# Altium PCB STLink_PCB.PcbDoc
Units mil, origin at the board's own origin, x right, y up, seen from the top; angles counter-clockwise.
Board outline 6570 x 4555 mil, 2 copper layers (Top Layer, Bottom Layer); 71 components, 59 nets, 205 pads, 45 vias.
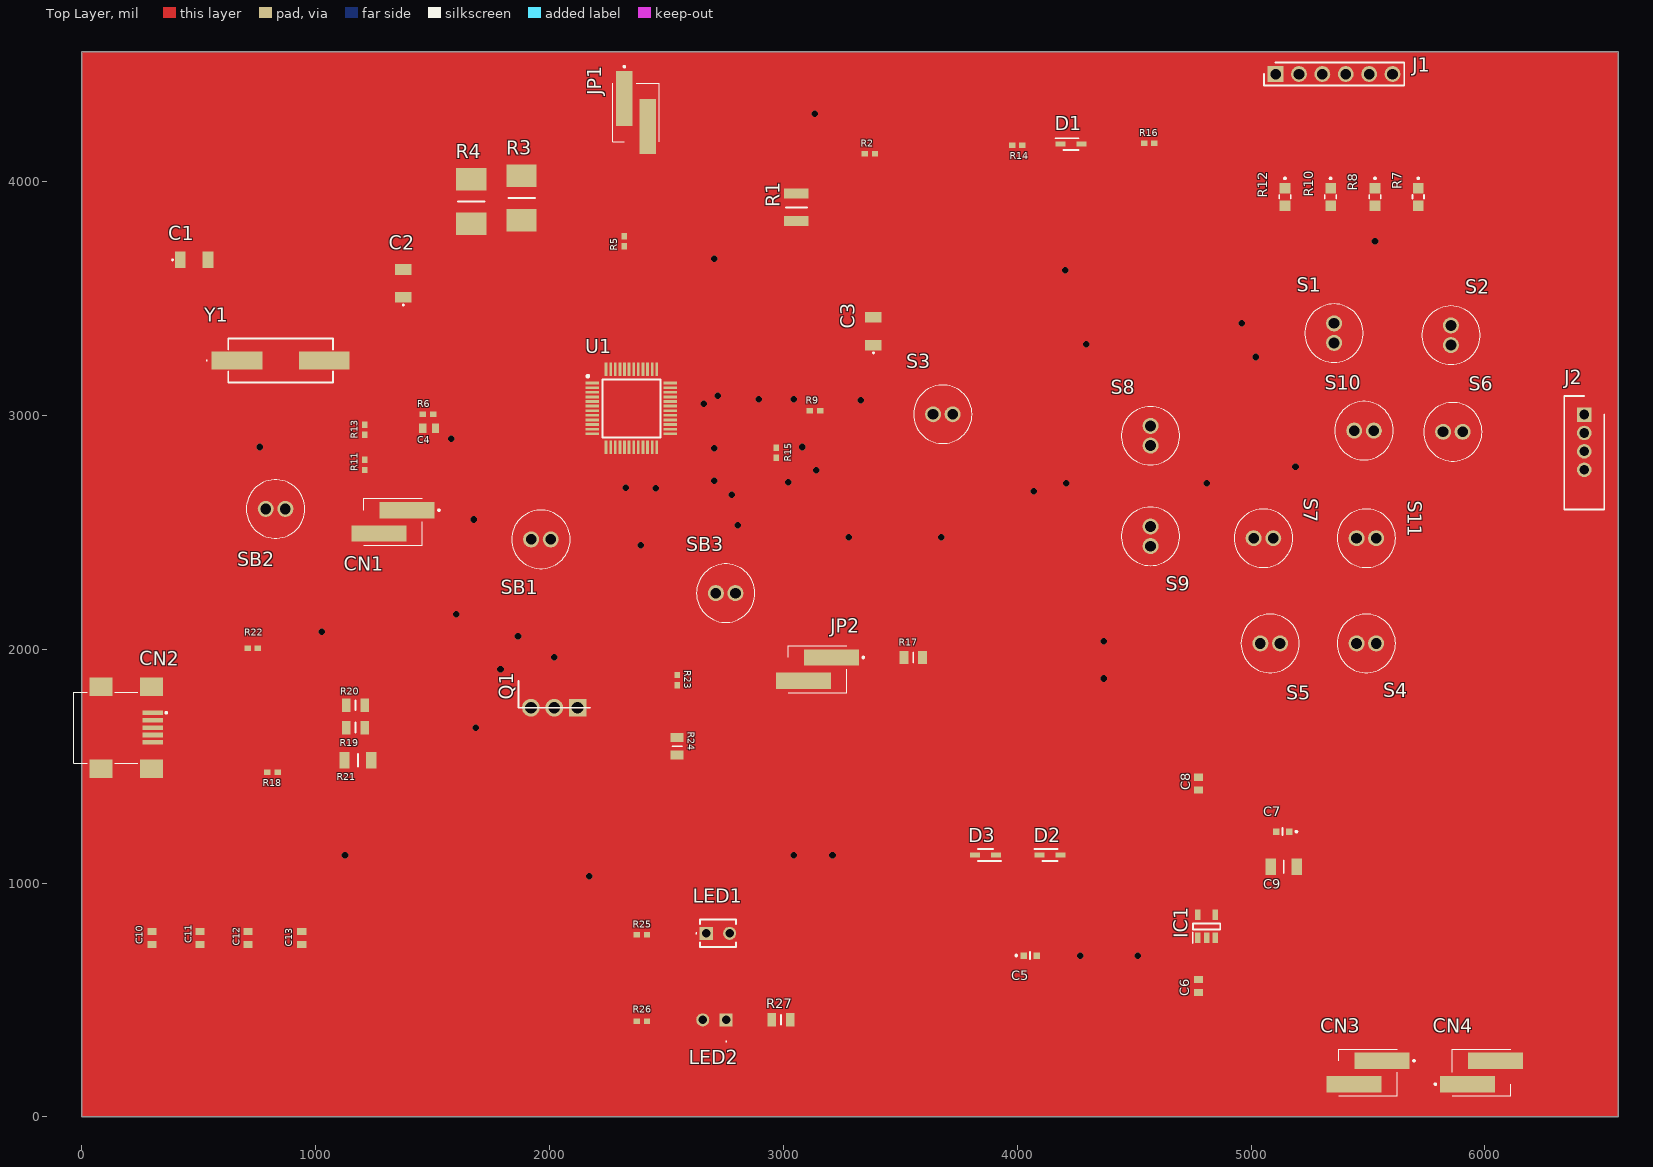
[diagram p0: Top Layer view]
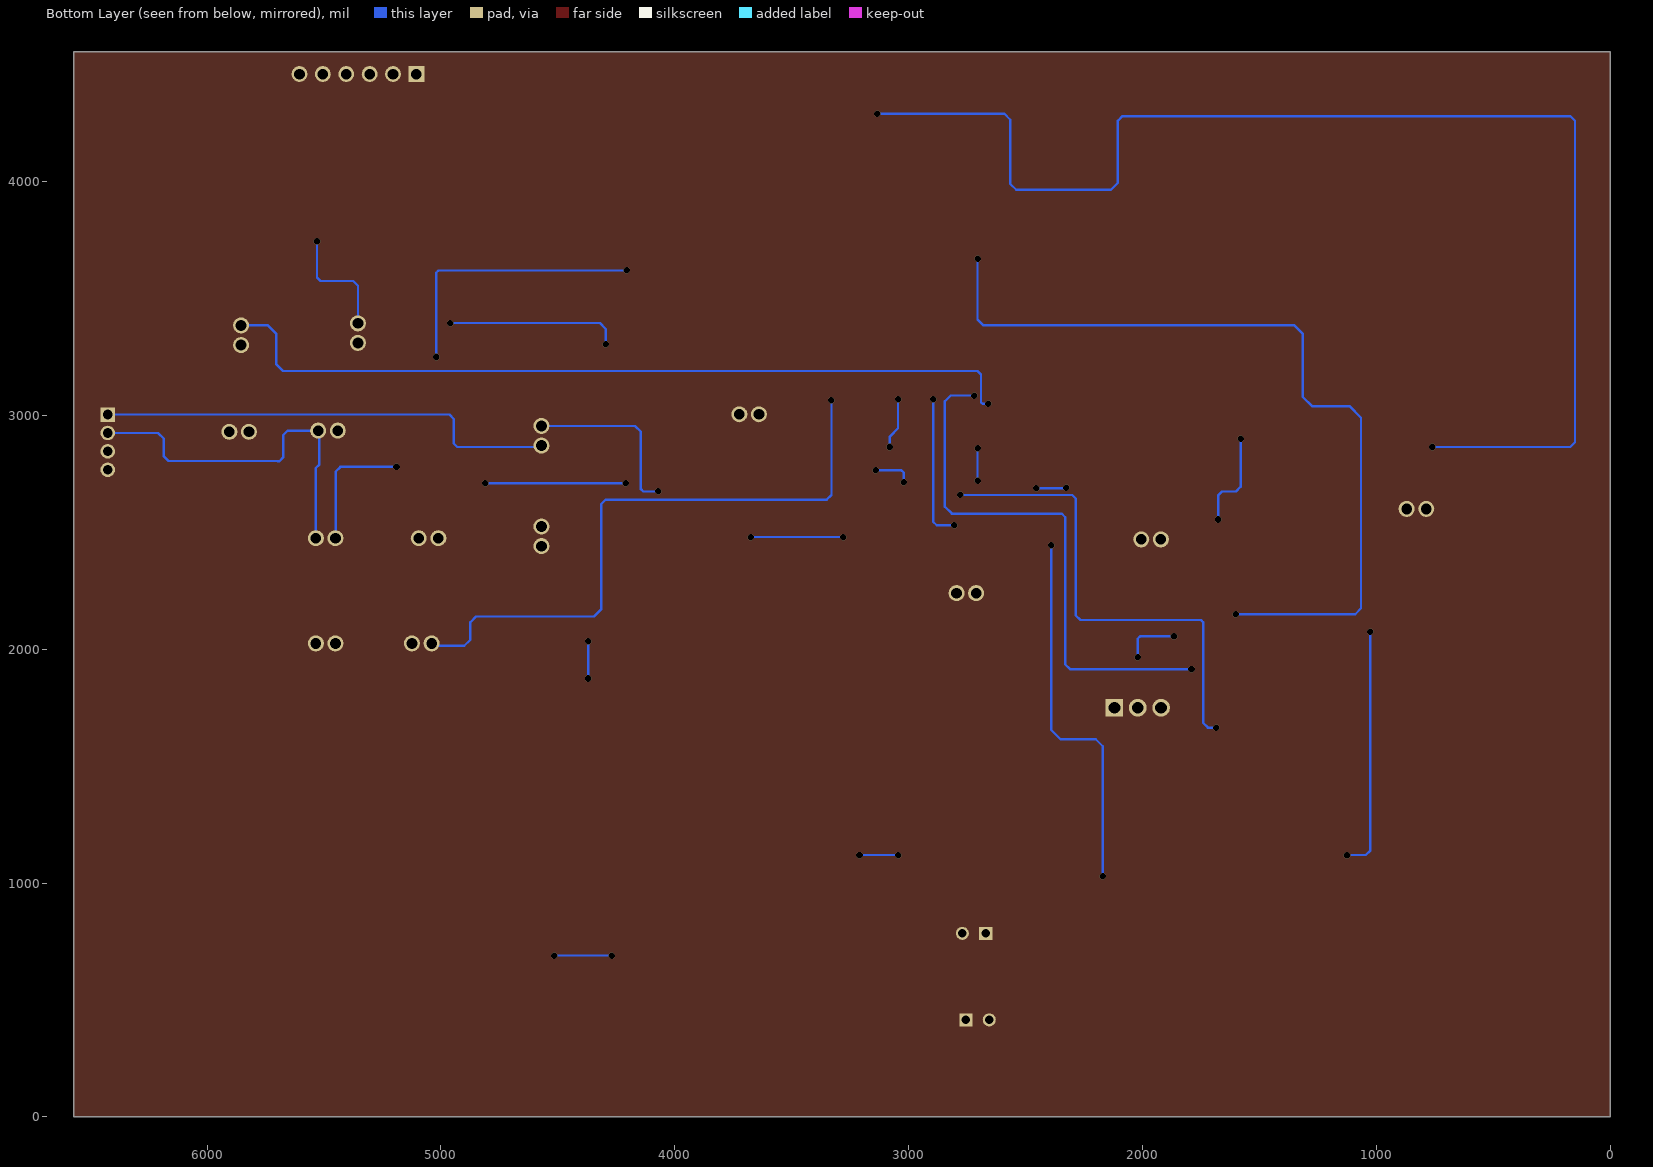
[diagram p1: Bottom Layer view, seen from below]
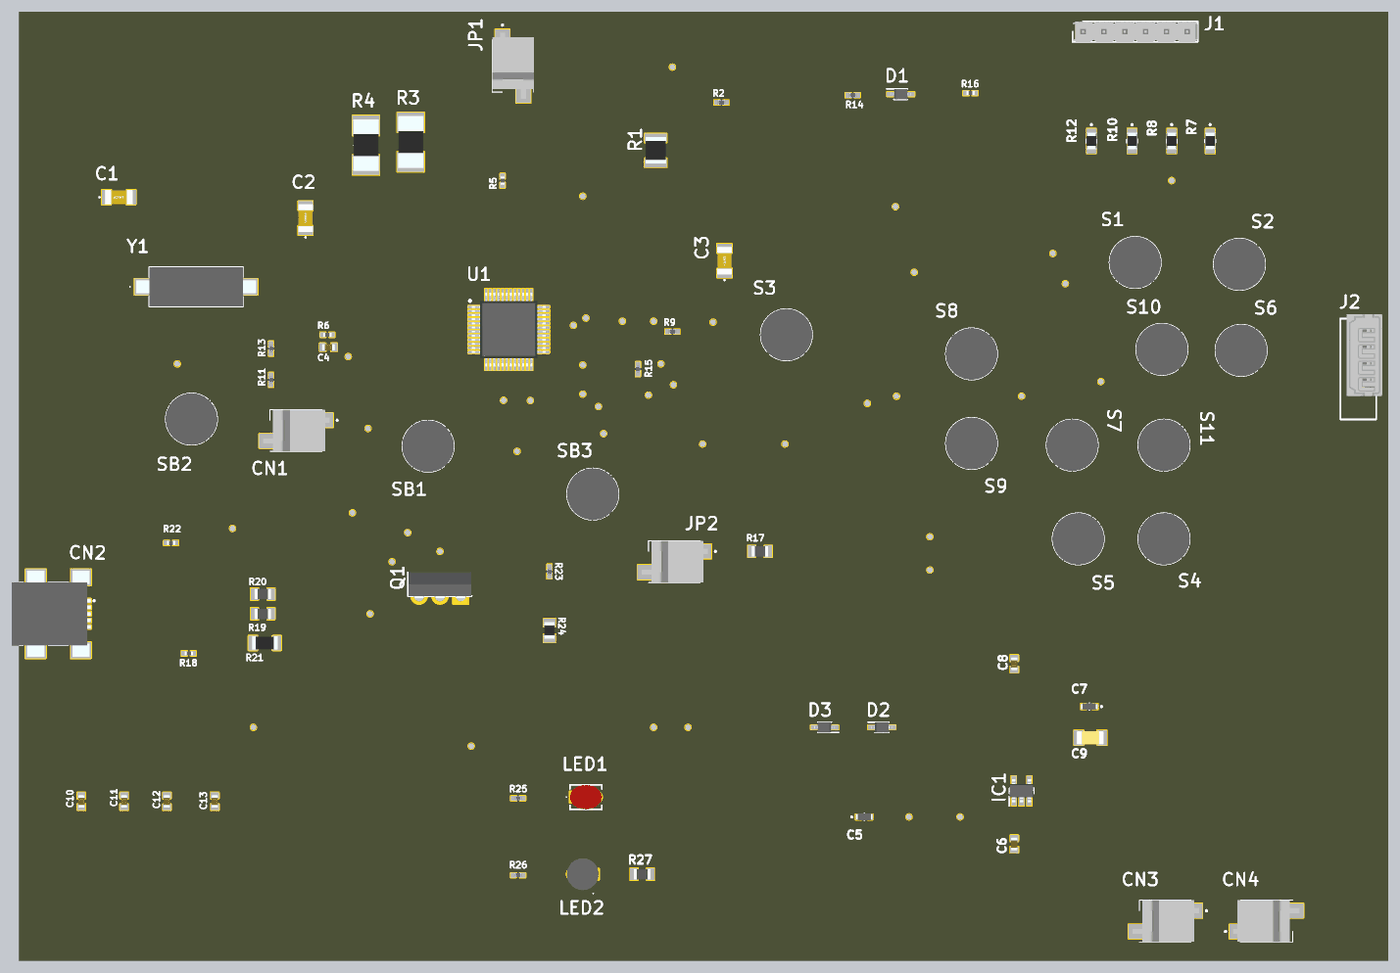
[diagram p2: 3D render of the assembled board from above, using the file's embedded part models]

## Layer stack, top to bottom
Top Solder: solder mask 0.4, Solder Resist, Dk 3.5
Top Layer: signal copper 1.4
Dielectric 1: dielectric 12.6, FR-4, Dk 4.8
Bottom Layer: signal copper 1.4
Bottom Solder: solder mask 0.4, Solder Resist, Dk 3.5

## Board outline
0,0 0,4555 6570,4555 6570,0

## Design rules (kind name [scope] priority, off if disabled: settings)
Clearance [All] p1: gap=10 ignorepadtopadclearanceinfootprint=FALSE
PolygonConnect [All] p1: connectstyle=Relief reliefconductorwidth=10 reliefentries=4 polygonreliefangle="90 Angle" airgapwidth=10
RoutingVias [All] p1: holewidth=28 width=50 viastyle="Through Hole" minholewidth=28 minwidth=50 maxholewidth=28 maxwidth=50
SolderMaskExpansion [All] p1: expansion=4 istentingtop=FALSE
Width [All] p1: maxlimit=10 minlimit=10 preferedwidth=10
30 further rules are at their usual default settings.

## Components (designator, comment, footprint, x,y, rotation, side; value= is the part's Value field where it differs from the comment)
C1 "20pF" C1206 480,3665 r0 top
C2 "20pF" C1206 1375,3565 r90 top
C3 "20pF" C1206 3385,3360 r90 top
C4 "100nF" CAPC1608X90N 1485,2945 r0 top
C5 "1uF" MAJx16 4055,690 r0 top
C6 "100nF" CAPC1608X90N 4775,560 r90 top
C7 "1uF" MAJx16 5135,1220 r180 top
C8 "100nF" CAPC1608X90N 4775,1425 r270 top
C9 "10nF X7R 0603" CAPC3316X145N 5140,1070 r180 top
C10 "100nF" CAPC1608X90N 300,765 r90 top
C11 "100nF" CAPC1608X90N 505,765 r90 top
C12 "100nF" CAPC1608X90N 710,765 r90 top
C13 "100nF" CAPC1608X90N 940,765 r90 top
CN1 "3-647166-2" 36471662 1330,2545 r90 top
CN2 "5075BMR-05-SM" 5075BMR05SM 165,1665 r270 top
CN3 "3-647166-2" 36471662 5500,190 r90 top
CN4 "3-647166-2" 36471662 5985,190 r270 top
D1 "BAT60JFILM" SOD2513X117N 4230,4160 r0 top
D2 "BAT60JFILM" SOD2513X117N 4140,1120 r0 top
D3 "BAT60JFILM" SOD2513X117N 3865,1120 r180 top
IC1 "LD3985M33R" SOT95P280X145-5N 4810,815 r90 top
J1 "22-28-4062" HDRV6W66P0X254_1X6_1524X249X838P 5105,4460 r0 top
J2 "53014-0410" SHDR4W60P0X200_1X4_1200X435X1000P 6425,3003.74 r90 top
JP1 "3-647166-2" 36471662 2370,4294.84 r180 top
JP2 "3-647166-2" 36471662 3145,1915 r90 top
LED1 "C4SMA-RGY-CS4V1BB1" C4SMARGYCS4V1BB1 2670,785 r0 top
LED2 "C4SMA-GGY-CU2W37A1" C4SMAGGYCU2W37A1 2755,415 r180 top
Q1 "BD139" TO254P290X760X1320-3P 2120,1750 r180 top
R1 "2K7" RESC3225X70N 3055,3890 r90 top
R2 "4K7" RESC1005X37N 3370,4120 r0 top
R3 "10K" RESC6331X80N 1880,3930 r270 top
R4 "10K" RESC6331X80N 1665,3915 r270 top
R5 "100K" RESC1005X40N 2320,3745 r90 top
R6 "100K" RESC1005X40N 1480,3005 r180 top
R7 "22" ERA6AEB1020V 5715,3935 r270 top
R8 "22" ERA6AEB1020V 5530,3935 r270 top
R9 "100" RESC1005X37N 3135,3020 r0 top
R10 "22" ERA6AEB1020V 5340,3935 r270 top
R11 "4K7" RESC1005X37N 1210,2788.35 r90 top
R12 "22" ERA6AEB1020V 5145,3935 r270 top
R13 "4K7" RESC1005X37N 1210,2938.35 r270 top
R14 "100" RESC1005X37N 4000,4155 r180 top
R15 "100" RESC1005X37N 2970,2840 r90 top
R16 "10K" RESC1005X40N 4565,4165 r180 top
R17 "0" RESC2013X84N 3555,1965 r0 top
R18 "100K" RESC1005X40N 815,1475 r180 top
R19 "0" RESC2013X84N 1170,1665 r0 top
R20 "0" RESC2013X84N 1170,1760 r0 top
R21 "1K5" RESC3116X65N 1180,1525 r0 top
R22 "10K" RESC1005X40N 730,2005 r180 top
R23 "100" RESC1005X37N 2545,1868.35 r90 top
R24 "36K" RESC2012X55N 2545,1585 r90 top
R25 "100" RESC1005X37N 2395,780 r0 top
R26 "100" RESC1005X37N 2395,410 r0 top
R27 "0" RESC2013X84N 2990,415 r0 top
S1 "8631CQD2" 8631CQD2 5355,3393.86 r270 top
S2 "8631CQD2" 8631CQD2 5855,3385 r270 top
S3 "8631CQD2" 8631CQD2 3640,3005 r0 top
S4 "8631CQD2" 8631CQD2 5535,2025 r180 top
S5 "8631CQD2" 8631CQD2 5123.86,2025 r180 top
S6 "8631CQD2" 8631CQD2 5821.14,2930 r0 top
S7 "8631CQD2" 8631CQD2 5095,2475 r180 top
S8 "8631CQD2" 8631CQD2 4570,2955 r270 top
S9 "8631CQD2" 8631CQD2 4570,2525 r270 top
S10 "8631CQD2" 8631CQD2 5441.14,2935 r0 top
S11 "8631CQD2" 8631CQD2 5535,2475 r180 top
SB1 "8631CQD2" 8631CQD2 2005,2470 r180 top
SB2 "8631CQD2" 8631CQD2 786.14,2600 r0 top
SB3 "8631CQD2" 8631CQD2 2795,2240 r180 top
U1 "STM32F103CBT6" QFP50P900X900X160-48N 2350,3030 r0 top
Y1 "ECS-80-12-5PX-GM-TR" ECS80125PXGMTR 850,3235 r0 top

## Footprints (in the part's own frame and the unit in brackets; to place one, negate y for a bottom-side part, rotate by r counter-clockwise, add the part's x,y. Pads: shape width x height; smd on the part's side, far side on the other; paste and mask are expansions set on the pad)
5075BMR05SM [mm]
  rect 0.5x2.25 smd: 1(-1.6,3.495) 2(-0.8,3.495) 3(0,3.495) 4(0.8,3.495) 5(1.6,3.495)
  rect 2x2.5 smd: 6(-4.45,3.37) 7(-4.45,-2.13) 8(4.45,-2.13) 9(4.45,3.37)
  silkscreen extent -3.85,-5.07 3.85,5.07, body extent -5.25,-5.07 5.25,4.57, height 4.1
8631CQD2 [mm]
  round 1.74 hole 1.16: 1(0,0) 2(2.13,0)
  silkscreen extent -2.11,-3.17 4.24,3.17, body extent -2.11,-3.18 4.24,3.18, height 14.03
36471662 [mm]
  rect 1.78x5.97 smd: 1(1.27,-1.52) 2(-1.27,1.52)
  silkscreen extent -2.54,-5.1 2.54,3.17, body extent -2.54,-4.08 2.54,4, height 10.55
C4SMAGGYCU2W37A1 [mm]
  rect 1.416x1.416 hole 0.91: 1(0,0)
  round 1.416 hole 0.91: 2(2.54,0)
  silkscreen extent -0.05,2.3 0.05,2.4, body extent -0.68,-1.95 3.22,1.95, height 8.9
C4SMARGYCS4V1BB1 [mm]
  rect 1.416x1.416 hole 0.91: 1(0,0)
  round 1.416 hole 0.91: 2(2.54,0)
  silkscreen extent -1.13,-1.5 3.22,1.5, body extent -0.68,-1.5 3.22,1.5, height 10.14
C1206 [mm]
  rect 1.15x1.8 smd: 1(-1.5,0) 2(1.5,0)
  silkscreen extent -2.4,-0.05 -2.3,0.05, body extent -1.7,-0.9 1.7,0.9, height 1.75
CAPC1608X90N [mm]
  rect 0.78x0.99 smd: 1(-0.7,0) 2(0.7,0)
  body extent -0.8,-0.41 0.8,0.41, height 0.9
CAPC3316X145N [mm]
  rect 1.17x1.82 smd: 1(-1.42,0) 2(1.42,0)
  silkscreen extent 0,-0.7 0,0.7, body extent -1.65,-0.8 1.65,0.8, height 1.68
ECS80125PXGMTR [mm]
  rect 5.5x2 smd: 1(-4.75,0) 2(4.75,0)
  silkscreen extent -8.1,-2.4 5.7,2.4, body extent -7.3,-2.4 7.3,2.4, height 4.4
ERA6AEB1020V [mm]
  rect 1.15x1.15 smd: 1(-0.95,0) 2(0.95,0)
  silkscreen extent -2.1,-0.63 0.2,0.63, body extent -1,-0.63 1,0.63, height 0.5
HDRV6W66P0X254_1X6_1524X249X838P [mm]
  rect 1.725x1.725 hole 1.15: 1(0,0)
  round 1.725 hole 1.15: 2(2.54,0) 3(5.08,0) 4(7.62,0) 5(10.16,0) 6(12.7,0)
  silkscreen extent -1.27,-1.24 13.97,1.24, body extent -1.27,-1.24 13.97,1.24, height 9.65
MAJx16 [mm]
  rect 0.7x0.7 smd: 1(-0.7,0) 2(0.7,0)
  silkscreen extent -1.6,-0.4 0,0.4, body extent -0.98,-0.4 0.98,0.4, height 0.9
QFP50P900X900X160-48N [mm]
  rect 1.475x0.3 smd: 1(-4.238,2.75) 2(-4.238,2.25) 3(-4.238,1.75) 4(-4.238,1.25) 5(-4.238,0.75) 6(-4.238,0.25) 7(-4.238,-0.25) 8(-4.238,-0.75) 9(-4.238,-1.25) 10(-4.238,-1.75) 11(-4.238,-2.25) 12(-4.238,-2.75) 25(4.238,-2.75) 26(4.238,-2.25) 27(4.238,-1.75) 28(4.238,-1.25) 29(4.238,-0.75) 30(4.238,-0.25) 31(4.238,0.25) 32(4.238,0.75) 33(4.238,1.25) 34(4.238,1.75) 35(4.238,2.25) 36(4.238,2.75)
  rect 0.3x1.475 smd: 13(-2.75,-4.238) 14(-2.25,-4.238) 15(-1.75,-4.238) 16(-1.25,-4.238) 17(-0.75,-4.238) 18(-0.25,-4.238) 19(0.25,-4.238) 20(0.75,-4.238) 21(1.25,-4.238) 22(1.75,-4.238) 23(2.25,-4.238) 24(2.75,-4.238) 37(2.75,4.238) 38(2.25,4.238) 39(1.75,4.238) 40(1.25,4.238) 41(0.75,4.238) 42(0.25,4.238) 43(-0.25,4.238) 44(-0.75,4.238) 45(-1.25,4.238) 46(-1.75,4.238) 47(-2.25,4.238) 48(-2.75,4.238)
  silkscreen extent -4.85,-3.15 3.15,3.62, body extent -4.5,-4.5 4.5,4.5, height 1.6
RESC1005X37N [mm]
  rect 0.7x0.6 smd: 1(-0.55,0) 2(0.55,0)
  body extent -0.5,-0.25 0.5,0.25, height 0.32
RESC1005X40N [mm]
  rect 0.7x0.6 smd: 1(-0.55,0) 2(0.55,0)
  body extent -0.5,-0.25 0.5,0.25, height 0.4
RESC2012X55N [mm]
  rect 1x1.45 smd: 1(-0.95,0) 2(0.95,0)
  silkscreen extent 0,-0.53 0,0.53, body extent -1,-0.63 1,0.63, height 0.55
RESC2013X84N [mm]
  rect 0.95x1.45 smd: 1(-1,0) 2(1,0)
  silkscreen extent 0,-0.54 0,0.54, body extent -1.01,-0.64 1.01,0.64, height 0.36
RESC3116X65N [mm]
  rect 1.1x1.8 smd: 1(-1.45,0) 2(1.45,0)
  silkscreen extent 0,-0.7 0,0.7, body extent -1.55,-0.8 1.55,0.8, height 0.65
RESC3225X70N [mm]
  rect 1.1x2.7 smd: 1(-1.5,0) 2(1.5,0)
  silkscreen extent 0,-1.15 0,1.15, body extent -1.6,-1.25 1.6,1.25, height 0.7
RESC6331X80N [mm]
  rect 2.45x3.3 smd: 1(-2.4,0) 2(2.4,0)
  silkscreen extent 0,-1.45 0,1.45, body extent -3.15,-1.55 3.15,1.55, height 0.8
SHDR4W60P0X200_1X4_1200X435X1000P [mm]
  rect 1.575x1.575 hole 1.05: 1(0,0)
  round 1.575 hole 1.05: 2(-2,0) 3(-4,0) 4(-6,0)
  silkscreen extent -10.3,-2.17 2,2.17, body extent -7.45,-2.96 2.55,1.39, height 5.85
SOD2513X117N [mm]
  rect 1.085x0.55 smd: 1(-1.14,0) 2(1.14,0)
  silkscreen extent -1.68,-0.64 0.83,0.64, body extent -1.25,-0.64 1.25,0.64, height 1.17
SOT95P280X145-5N [mm]
  rect 1.15x0.6 smd: 1(-1.25,0.95) 2(-1.25,0) 3(-1.25,-0.95) 4(1.25,-0.95) 5(1.25,0.95)
  silkscreen extent -1.83,-1.48 0.33,1.5, body extent -1.4,-1.48 1.4,1.48, height 1.45
TO254P290X760X1320-3P [mm]
  rect 1.92x1.92 hole 1.28: 1(0,0)
  round 1.92 hole 1.28: 2(2.54,0) 3(5.08,0)
  silkscreen extent -1.36,-2.9 6.44,0, body extent -1.26,-2.9 6.34,0.26, height 12.92

## Part data
C1 C2 C3: library part C1206C200KCGACTU, "Capacitor", Manufacturer_Name=KEMET, Datasheet Link=https://content.kemet.com/datasheets/KEM_C1009_C0G_HV_SMD.pdf, Manufacturer_Part_Number=C1206C200KCGACTU
C4 C6 C8 C10 C11 C12 C13: library part KAM15AR71H104KM, "Capacitor", Manufacturer_Name="Kyocera AVX", Mouser Part Number=581-KAM15AR71H104KM, Arrow Part Number=KAM15AR71H104KM, Arrow Price/Stock=https://www.arrow.com/en/products/kam15ar71h104km/avx?region=nac, Datasheet Link=https://datasheets.kyocera-avx.com/AutoMLCCKAM.pdf, Height=0.9mm, Manufacturer_Part_Number=KAM15AR71H104KM, Mouser Price/Stock=https://www.mouser.co.uk/ProductDetail/KYOCERA-AVX/KAM15AR71H104KM?qs=Jm2GQyTW%2FbgzS5FHJWrFzQ%3D%3D
C5 C7: library part MAJCT168BB7105KTEA01, "Capacitor", Manufacturer_Name="TAIYO YUDEN", Datasheet Link=https://ds.yuden.co.jp/TYCOMPAS/or/detail?pn=MAJCT168BB7105KTEA01, Height=0.8mm, Manufacturer_Part_Number=MAJCT168BB7105KTEA01
C9: library part KGM31GCG2J103JU, "Capacitor", Manufacturer_Name="Kyocera AVX", Mouser Part Number=581-KGM31GCG2J103JU, Datasheet Link=https://datasheets.kyocera-avx.com/HVKGM.pdf, Height=1.45mm, Manufacturer_Part_Number=KGM31GCG2J103JU, Mouser Price/Stock=https://www.mouser.co.uk/ProductDetail/KYOCERA-AVX/KGM31GCG2J103JU?qs=63Lh8XYXgjt6ivbLeGkCxg%3D%3D
CN1 CN3 CN4 JP1 JP2: "Connector", Manufacturer_Name="TE Connectivity", Mouser Part Number=571-3-647166-2, Arrow Part Number=3-647166-2, Arrow Price/Stock=https://www.arrow.com/en/products/3-647166-2/te-connectivity?region=nac, Datasheet Link=https://www.te.com/commerce/DocumentDelivery/DDEController?Action=showdoc&DocId=Customer+Drawing%7F647166%7FR1%7Fpdf%7FEnglish%7FENG_CD_647166_R1.pdf%7F3-647166-2, Height=10.66mm, Manufacturer_Part_Number=3-647166-2, Mouser Price/Stock=https://www.mouser.co.uk/ProductDetail/TE-Connectivity/3-647166-2?qs=xsTFCgGnzbJU1qz6Np9kzA%3D%3D
CN2: "Connector", Manufacturer_Name=NELTRON, Datasheet Link=http://www.ibselectronics.com/ibsstore/datasheet/5075BMR-05-SM-CR.pdf, Height=4mm, Manufacturer_Part_Number=5075BMR-05-SM
D1 D2 D3: "Schottky Diode", Manufacturer_Name=STMicroelectronics, Mouser Part Number=511-BAT60JFILM, Arrow Part Number=BAT60JFILM, Arrow Price/Stock=https://www.arrow.com/en/products/bat60jfilm/stmicroelectronics?region=nac, Datasheet Link=https://www.mouser.jp/datasheet/2/389/cd00001944-1795661.pdf, Height=1.17mm, Manufacturer_Part_Number=BAT60JFILM, Mouser Price/Stock=https://www.mouser.co.uk/ProductDetail/STMicroelectronics/BAT60JFILM?qs=GnFZssByvVVVnMaukcyLZg%3D%3D
IC1: "Integrated Circuit", Manufacturer_Name=STMicroelectronics, Mouser Part Number=511-LD3985M33R, Arrow Part Number=LD3985M33R, Arrow Price/Stock=https://www.arrow.com/en/products/ld3985m33r/stmicroelectronics?region=europe, Datasheet Link=http://www.st.com/st-web-ui/static/active/en/resource/technical/document/datasheet/CD00003395.pdf, Height=1.45mm, Manufacturer_Part_Number=LD3985M33R, Mouser Price/Stock=https://www.mouser.co.uk/ProductDetail/STMicroelectronics/LD3985M33R?qs=22WmWNTp1rrPOccVv4HZ7A%3D%3D
J1: "Connector", Manufacturer_Name=Molex, Mouser Part Number=538-22-28-4062, Datasheet Link=https://datasheet.datasheetarchive.com/originals/distributors/SFDatasheet-1/sf-00031037.pdf, Height=8.38mm, Manufacturer_Part_Number=22-28-4062, Mouser Price/Stock=https://www.mouser.com/Search/Refine.aspx?Keyword=538-22-28-4062
J2: "Connector", Manufacturer_Name=Molex, Mouser Part Number=538-53014-0410, Datasheet Link=https://www.molex.com/pdm_docs/sd/530140410_sd.pdf, Height=10mm, Manufacturer_Part_Number=53014-0410, Mouser Price/Stock=https://www.mouser.co.uk/ProductDetail/Molex/53014-0410?qs=TLs3Kb%252BkMqKk8s1WRHwRGw%3D%3D
LED1: "LED", Manufacturer_Name="CREE LED", Mouser Part Number=941-C4SMARGYCS4V1BB1, Arrow Part Number=C4SMA-RGY-CS4V1BB1, Arrow Price/Stock=https://www.arrow.com/en/products/c4sma-rgy-cs4v1bb1/cree-led?region=nac, Datasheet Link=https://cree-led.com/media/documents/C4SMA-1442.pdf, Height=8.8mm, Manufacturer_Part_Number=C4SMA-RGY-CS4V1BB1, Mouser Price/Stock=https://www.mouser.co.uk/ProductDetail/Cree-LED/C4SMA-RGY-CS4V1BB1?qs=7D1LtPJG0i08%2Fw1qRIcnyw%3D%3D
LED2: "LED", Manufacturer_Name="CREE LED", Mouser Part Number=941-C4SMAGGYCU2W37A1, Datasheet Link=https://cree-led.com/media/documents/C4SMA-1442.pdf, Height=8.8mm, Manufacturer_Part_Number=C4SMA-GGY-CU2W37A1, Mouser Price/Stock=https://www.mouser.co.uk/ProductDetail/Cree-LED/C4SMA-GGY-CU2W37A1?qs=7D1LtPJG0i1gnYL5Rh9Mjg%3D%3D
Q1: "Transistor BJT NPN", Manufacturer_Name=STMicroelectronics, Mouser Part Number=511-BD139, Arrow Part Number=BD139, Arrow Price/Stock=https://www.arrow.com/en/products/bd139/stmicroelectronics?region=europe, Datasheet Link=http://www.st.com/web/en/resource/technical/document/datasheet/CD00001225.pdf, Height=2.9mm, Manufacturer_Part_Number=BD139, Mouser Price/Stock=https://www.mouser.co.uk/ProductDetail/STMicroelectronics/BD139?qs=ljbEvF4DwOPW%2FLxHSWYMMA%3D%3D
R1: library part CRCW12102K70FKEAHP, "Resistor", Manufacturer_Name=Vishay, Mouser Part Number=71-CRCW12102K70FKEAH, Datasheet Link=http://componentsearchengine.com/Datasheets/1/CRCW12102K70FKEAHP.pdf, Height=0.7mm, Manufacturer_Part_Number=CRCW12102K70FKEAHP, Mouser Price/Stock=https://www.mouser.co.uk/ProductDetail/Vishay-Dale/CRCW12102K70FKEAHP?qs=OAzHGkhREL0m0%252BU1n6AaAg%3D%3D
R2 R11 R13: library part MCS04020D4701BE000, "Resistor", Manufacturer_Name=Vishay, Mouser Part Number=594-MCS04020D4701BE0, Datasheet Link=http://www.vishay.com/docs/28705/mcx0x0xpro.pdf, Height=0.37mm, Manufacturer_Part_Number=MCS04020D4701BE000, Mouser Price/Stock=https://www.mouser.co.uk/ProductDetail/Vishay-Beyschlag/MCS04020D4701BE000?qs=ft9OtscSA3%252BR0DpF5QqL2Q%3D%3D
R3 R4: library part CRM2512QJW-103ELF, "Resistor", Manufacturer_Name=Bourns, Mouser Part Number=652-CRM2512QJW-103E, Arrow Part Number=CRM2512QJW-103ELF, Arrow Price/Stock=https://www.arrow.com/en/products/crm2512qjw-103elf/bourns?region=nac, Datasheet Link=http://www.bourns.com/data/global/pdfs/CRM0805_1206_2010.pdf, Height=0.8mm, Manufacturer_Part_Number=CRM2512QJW-103ELF, Mouser Price/Stock=https://www.mouser.co.uk/ProductDetail/Bourns/CRM2512QJW-103ELF?qs=8Wlm6%252BaMh8Rzg3bRHdWGsA%3D%3D
R5 R6 R16 R18 R22: library part SFR01MZPF1003, "Resistor", Manufacturer_Name="ROHM Semiconductor", Mouser Part Number=755-SFR01MZPF1003, Datasheet Link=https://fscdn.rohm.com/en/products/databook/datasheet/passive/resistor/chip_resistor/sfr-e.pdf, Height=0.4mm, Manufacturer_Part_Number=SFR01MZPF1003, Mouser Price/Stock=https://www.mouser.co.uk/ProductDetail/ROHM-Semiconductor/SFR01MZPF1003?qs=Mv7BduZupUj2RFL5gMaKTg%3D%3D
R7 R8 R10 R12: library part ERA-6AHD220V, "Resistor", Manufacturer_Name=Panasonic, Mouser Part Number=667-ERA-6AHD220V, Datasheet Link=https://industrial.panasonic.com/cdbs/www-data/pdf/RDM0000/AOA0000C307.pdf, Height=0.6mm, Manufacturer_Part_Number=ERA-6AHD220V, Mouser Price/Stock=https://www.mouser.co.uk/ProductDetail/Panasonic/ERA-6AHD220V/?qs=MNPzkKEzRtQTWqg2JSKn2A%3D%3D
R9 R14 R15 R23 R25 R26: library part MCS04020C1000FE000, "Resistor", Manufacturer_Name=Vishay, Mouser Part Number=594-MCS04020C1000FE0, Arrow Part Number=MCS04020C1000FE000, Arrow Price/Stock=https://www.arrow.com/en/products/mcs04020c1000fe000/vishay, Datasheet Link=http://www.vishay.com/docs/28705/mcx0x0xpro.pdf, Height=0.37mm, Manufacturer_Part_Number=MCS04020C1000FE000, Mouser Price/Stock=https://www.mouser.co.uk/ProductDetail/Vishay-Beyschlag/MCS04020C1000FE000?qs=7ZE6F4QMOBYkwvQlfbkT8w%3D%3D
R17 R19 R20 R27: library part WSL080500000ZEA9, "Resistor", Manufacturer_Name=Vishay, Mouser Part Number=71-WSL080500000ZEA9, Arrow Part Number=WSL080500000ZEA9, Arrow Price/Stock=https://www.arrow.com/en/products/wsl080500000zea9/vishay?region=nac, Datasheet Link=https://ad.componentsearchengine.com/Datasheets/2/WSL080500000ZEA9.pdf, Height=0.838mm, Manufacturer_Part_Number=WSL080500000ZEA9, Mouser Price/Stock=https://www.mouser.co.uk/ProductDetail/Vishay-Dale/WSL080500000ZEA9?qs=f1l5vAGoKgsImKS87N8TmQ%3D%3D
R21: library part CRCW12061K50FKEAHP, "Resistor", Manufacturer_Name=Vishay, Mouser Part Number=71-CRCW12061K50FKEAH, Arrow Part Number=CRCW12061K50FKEAHP, Arrow Price/Stock=https://www.arrow.com/en/products/crcw12061k50fkeahp/vishay?region=nac, Datasheet Link=http://componentsearchengine.com/Datasheets/1/CRCW12061K50FKEAHP.pdf, Height=0.65mm, Manufacturer_Part_Number=CRCW12061K50FKEAHP, Mouser Price/Stock=https://www.mouser.co.uk/ProductDetail/Vishay-Dale/CRCW12061K50FKEAHP?qs=k2%2FDWSARqgEwHXAQbL4aEg%3D%3D
R24: library part TNPW080536K0BEEA, "Resistor", Manufacturer_Name=Vishay, Datasheet Link=https://www.vishay.com/docs/31006/tnpw.pdf, Height=0.55mm, Manufacturer_Part_Number=TNPW080536K0BEEA
S1 S2 S3 S4 S5 S6 S7 S8 S9 S10 S11 SB1 SB2 SB3: "Switch (2-Pin Push)", Manufacturer_Name="C & K COMPONENTS", Mouser Part Number=611-8631-261, Datasheet Link=https://www.ckswitches.com/media/1396/8600.pdf, Height=13.93mm, Manufacturer_Part_Number=8631CQD2, Mouser Price/Stock=https://www.mouser.co.uk/ProductDetail/CK/8631CQD2?qs=ktcBc77oICXe9iPhfEwnkA%3D%3D
U1: "Integrated Circuit", Manufacturer_Name=STMicroelectronics, Mouser Part Number=511-STM32F103CBT6, Arrow Part Number=STM32F103CBT6, Arrow Price/Stock=https://www.arrow.com/en/products/stm32f103cbt6/stmicroelectronics?region=europe, Datasheet Link=http://www.st.com/st-web-ui/static/active/en/resource/technical/document/datasheet/CD00161566.pdf, Height=1.6mm, Manufacturer_Part_Number=STM32F103CBT6, Mouser Price/Stock=https://www.mouser.co.uk/ProductDetail/STMicroelectronics/STM32F103CBT6?qs=WxFF5lh7QM3goh6GV5Ogig%3D%3D
Y1: "Crystal or Oscillator", Manufacturer_Name=ECS, Mouser Part Number=520-80-12-5PX-GM-TR, Datasheet Link=https://ecsxtal.com/store/pdf/csm-7x.pdf, Height=4.3mm, Manufacturer_Part_Number=ECS-80-12-5PX-GM-TR, Mouser Price/Stock=https://www.mouser.co.uk/ProductDetail/ECS/ECS-80-12-5PX-GM-TR?qs=amGC7iS6iy%252BwzUdIY7WpOA%3D%3D

## Via types
v1: diameter 28, hole 28, Top Layer to Bottom Layer, 45 vias

## Nets (pads, with @x,y where several pads share a name; then routed paths per layer and width w, separated by ;. In a path a pad name is that pad's centre, name@x,y a point inside that pad or via, vN(x,y) a via of type N, cw(c..) or ccw(c..) an arc to the next point about the centre after c; other vN are vias at no path point)
+3V3: R11.1
+3V3_ST_LINK: C7.2 C8.2 C10.2 C11.2 C12.2 C13.2 IC1.5 JP1.1 Q1.2 R6.2 R17.2 R27.2 S9.2 U1.1 U1.9 U1.24 U1.36 U1.48 | length 17419.7
  Top Layer w9.96: U1.1@2183.15,3140 2240,3140 ; U1.9@2184.37,2982.01 2312.01,2982.01 2325,2995 2325,3090 ; U1.48@2240,3210 2240,3140 ; U1.24 2458.27,3090 ; 2460,3090 2458.27,3090 ; U1.36 2468.27,3138.27 2458.27,3128.27 2458.27,3090 ; 2240,3140 2240,3105 2255,3090 2325,3090 ; 2325,3090 2458.27,3090
  Top Layer w10: C10.2 300,915 310,925 505,925 ; C11.2 505,920 510,925 710,925 ; C12.2 710,925 ; C13.2 940,925 ; R6.2 1360,3005 ; v1(1865,2055) 1550,2055 1530,2075 1530,2260 1510,2280 560,2280 525,2315 525,2975 555,3005 1360,3005 ; v1(2020,1965) Q1.2 2020,1195 ; U1.9@2184.37,2982.01 U1.9 2181.93,2979.57 1674.57,2979.57 1665,2970 1665,2875 1650,2860 1375,2860 1360,2875 1360,3005 ; U1.48 2241.73,3961.73 2265,3985 2295,3985 2320,4010 JP1.1 ; R27.2 3125,415 ; R17.2 4570,1965 ; S9.2 4570,1965 ; IC1.5 4775,866.61 4775,1080 ; C8.2 4775,1220 ; C7.2 4775,1220 ; 710,925 940,925 ; 940,925 940,1170 965,1195 2020,1195 ; 2020,1195 2815,1195 2815.86,1194.14 2824.14,1194.14 2825,1195 3105,1195 3125,1175 3125,415 ; 3125,415 4400,415 4420,435 4420,1060 4440,1080 4775,1080 ; 4570,1965 4570,1235 4585,1220 4775,1220 ; 4775,1080 4775,1220
  Bottom Layer w10: v1(1865,2055) 2010,2055 2020,2045 v1(2020,1965)
"AIN 1": R11.2 R13.2 R14.2 U1.10 | length 8248.6
  Top Layer w10: v1(760,2865) 1210,2865 ; R11.2 1210,2863.35 ; R13.2 1210,2863.35 ; U1.10@2183.15,2959.57 1715,2959.57 1700,2944.57 1700,2815 1680,2795 1335,2795 1315,2815 1315,2850 1301.65,2863.35 1210,2863.35 ; v1(3135,4290) 3560,4290 3575,4275 3575,4175 3595,4155 R14.2
  Bottom Layer w10: v1(760,2865) 170,2865 150,2885 150,4260 170,4280 2085,4280 2105,4260 2105,3995 2135,3965 2540,3965 2565,3990 2565,4265 2590,4290 v1(3135,4290)
E5V: D2.2 R1.1 | length 4164.2
  Top Layer w10: R1.1 3055,3715 3090,3680 4345,3680 4370,3655 v1(4370,2035) ; D2.2 4350,1120 4370,1140 v1(4370,1875)
  Bottom Layer w10: v1(4370,1875) v1(4370,2035)
GND: C1.2 C2.2 C3.2 C4.1 C5.1 C6.1 C7.1 C8.1 C9.1 C10.1 C11.1 C12.1 C13.1 CN2.5 CN2.6 CN2.7 CN2.8 CN2.9 CN3.1 CN3.2 CN4.1 CN4.2 IC1.2 J1.3 JP2.2 LED1.2 R2.2 R3.1 R4.1 R5.2 R13.1 R16.1 R18.1 R24.1 S7.2 SB1.1 U1.8 U1.20 U1.23 U1.35 U1.47 | length 1494.5
  Top Layer w10: C10.1 300,535 315,520 505,520 ; C11.1 505,520 ; C12.1 710,520 ; C13.1 940,535 925,520 710,520 ; R5.2 R5.2@2321.65,3765 ; 505,520 710,520
"LED STLINK": R25.1 R26.1 U1.30 | length 4188.2
  Top Layer w10: v1(2170,1030) 2170,780 ; R26.1 2185,410 2170,425 2170,780 ; R25.1 2170,780 ; v1(2390,2445) 2390,2515 2405,2530 v1(2805,2530) ; U1.30@2516.85,3019.53 2642.81,3019.53 2643.76,3020.47 2685,3020.47 2704.53,3040 2805,3040 2815,3050 2815,3099.14 2820.86,3105 2889.14,3105 2895,3099.14 v1(2895,3070)
  Bottom Layer w10: v1(2170,1030) 2170,1585 2200,1615 2350,1615 2390,1655 v1(2390,2445) ; v1(2805,2530) 2880,2530 2895,2545 v1@2895,3060
MCO: S3.2
NetC3_1: C3.1 R9.2 S3.1 | length 787.6
  Top Layer w10: R9.2 3210,3020 3225,3005 3385,3005 ; C3.1 3385,3005 ; S3.1@3635,3000 S3.1 ; S3.1@3635,3005 3385,3005
NetC5_2: C5.2 C6.2 D2.1 D3.1 IC1.1 IC1.3 | length 1761.6
  Top Layer w10: D3.1 4030,1120 ; C5.2 4176.28,690 ; D2.1 4030,1120 ; v1(4270,690) 4176.28,690 ; v1(4515,690) 4772.6,690 ; IC1.1 4772.6,690 ; C6.2 4772.6,589.96 4772.6,690 ; IC1.3 4847.4,702.4 4835,690 4772.6,690 ; 4030,1120 4030,905 4040,895 4165,895 4176.28,883.72 4176.28,690
  Bottom Layer w10: v1(4270,690) v1(4515,690)
NetC9_2: C9.2 IC1.4 | length 432.2
  Top Layer w10: IC1.4 4847.4,1052.4 4865,1070 C9.2
NetCN2_2: CN2.2 R20.1 | length 854.3
  Top Layer w10: CN2.2 966.5,1696.5 1030,1760 R20.1
NetCN2_3: CN2.3 R19.1 R21.1 | length 1112.2
  Top Layer w10: CN2.3 970,1665 ; R21.1 985,1525 970,1540 970,1665 ; R19.1 970,1665
NetCN2_4: CN2.4 R18.2 | length 645.5
  Top Layer w10: CN2.4 581.5,1633.5 590,1625 590,1485 600,1475 R18.2 R18.2@788.35,1470
NetD1_1: D1.1 R14.1 | length 165.5
  Top Layer w10: R14.1 4024.15,4157.5 4182.62,4157.5 D1.1
NetD1_2: D1.2 J1.1 R16.2 | length 1205.5
  Top Layer w10: D1.2 4277.38,4162.5 4450,4162.5 ; R16.2 4540.85,4162.5 4450,4162.5 ; J1.1 5105,4365 5090,4350 4465,4350 4450,4335 4450,4162.5
NetJ1_2: J1.2 R12.1 | length 512.5
  Top Layer w10: R12.1 5145,4285 5200,4340 5200,4455 J1.2
NetJ1_4: J1.4 R10.1 | length 514.5
  Top Layer w10: R10.1 5340,4280 5405,4345 J1.4
NetJ1_5: J1.5 R8.1 | length 498
  Top Layer w10: J1.5 5505,4350 5530,4325 R8.1
NetJ1_6: J1.6 R7.1 | length 571.2
  Top Layer w10: J1.6 5605,4380 5625,4360 5690,4360 5715,4335 R7.1
NetJ2_1: J2.1 S8.2 S9.1 | length 2322.7
  Top Layer w10: S9.1 S8.2
  Bottom Layer w10: S8.2 4576.14,2865 4930,2865 4945,2880 4945,2985 4963.74,3003.74 J2.1
NetJ2_2: J2.2 S10.2 S11.1 | length 1572.1
  Bottom Layer w10: S11.1 5535,2775 5520,2790 5520,2930 S10.2 5655,2935 5675,2915 5675,2820 5690.86,2804.14 5699.14,2804.14 5700,2805 6165,2805 6185,2825 6185,2900 6210,2925 J2.2
NetJ2_3: J2.3 S6.2 S7.1 | length 2219.7
  Top Layer w10: S7.1 5255,2475 5265,2465 5265,2300 5290,2275 5880,2275 5905,2300 S6.2 6130,2930 6145,2915 6145,2855 6153.74,2846.26 J2.3
NetJ2_4: J2.4 S4.2 S5.1 | length 2482.8
  Top Layer w10: S5.1 S4.2 5450,2023.86 5450,1815 5480,1785 6125,1785 6145,1805 6145,2745 6167.52,2767.52 J2.4
NetJP1_2: JP1.2 R1.2 R2.1 U1.39 | length 2795.3
  Top Layer w10: U1.39 2418.9,4233.9 JP1.2 2420,4500 2435,4515 3040,4515 3055,4500 3055,4120 ; R1.2 3055,4120 ; R2.1 3055,4120
NetJP2_1: JP2.1 R17.1 U1.21 | length 2175.8
  Top Layer w10: U1.21 2399.21,2640.79 2420,2620 3370,2620 3390,2600 3390,1965 ; JP2.1 3390,1965 ; R17.1 3390,1965
NetLED1_1: LED1.1 R25.2 | length 255.4
  Top Layer w10: R25.2 2665,780 LED1.1
NetLED2_1: LED2.1 R27.1 | length 195.6
  Top Layer w10: LED2.1 R27.1
NetLED2_2: LED2.2 R26.2 | length 240.4
  Top Layer w10: R26.2 2419.15,412.5 2652.5,412.5 LED2.2
NetQ1_1: Q1.1 R22.1 R23.1 R24.2 | length 2252.1
  Top Layer w10: R22.1 2085,2005 2115,1975 2115,1755 Q1.1 2545,1750 ; R24.2 2545,1750 ; R23.1 2545,1750
NetQ1_3: Q1.3 R21.2 | length 899.8
  Top Layer w10: R21.2 1905,1525 1920.86,1540.86 1920.86,1629.85 1920,1630.71 Q1.3
NetR3_2: R3.2 U1.2 | length 1000.5
  Top Layer w10: R3.2 1880,3155 1915,3120 2178.28,3120 2179.7,3118.58 U1.2 U1.2@2181.93,3119.8
NetR4_2: R4.2 U1.3 | length 1219.2
  Top Layer w10: R4.2 1665,3135 1702.5,3097.5 U1.3@2183.15,3097.5
NetR5_1: R5.1 U1.44 | length 526.7
  Top Layer w10: R5.1 2320.47,3722.87 U1.44
NetR9_1: R9.1 U1.29 | length 605
  Top Layer w10: U1.29@2516.85,2999.53 2651.1,2999.53 2652.04,3000.47 2700.47,3000.47 2720,3020 R9.1
NetS1_2: S1.2
NetS2_2: S2.2
NetS4_1: S4.1
NetS10_1: S10.1
NetSB2_1: SB2.1
NetSB3_1: SB3.1
NetU1_28: U1.28
"OSC IN": C2.1 U1.5 Y1.2 | length 1568.7
  Top Layer w10: Y1.2 1375,3235 ; C2.1 1375,3235 ; U1.5@2183.15,3060 1640,3060 1625,3075 1625,3210 1600,3235 1375,3235
"OSC OUT": C1.1 U1.6 Y1.1 | length 2897.4
  Top Layer w10: C1.1 270,3665 250,3645 250,3245 260,3235 445,3235 ; Y1.1 445,3235 ; U1.6 1560.16,3039.84 1525,3075 465,3075 445,3095 445,3235
STLINK_RX: CN1.2 SB3.2 U1.13 | length 2390.1
  Top Layer w10: CN1.2 1585,2495 1605,2475 1605,2225 1630,2200 2240,2200 ; U1.13 2241.73,2201.73 2240,2200 ; SB3.2 2525,2240 2485,2200 2240,2200
STLINK_TX: CN1.1 SB2.2 U1.12 | length 1630.4
  Top Layer w10: SB2.2 1384.84,2600 CN1.1 1394.84,2590 1750,2590 1765,2605 1765,2905 1781.73,2921.73 U1.12
"STM JTCK": S11.2 U1.37 | length 4524.2
  Top Layer w10: U1.37 2458.27,3603.27 2475,3620 v1(4205,3620) ; v1(5020,3250) 5020,2795 5035,2780 v1(5190,2780)
  Bottom Layer w10: v1(4205,3620) 5010,3620 5020,3610 v1(5020,3250) ; v1(5190,2780) 5430,2780 5450,2760 5450,2476.14 S11.2
"STM JTMS": S5.2 U1.34 | length 3591.4
  Top Layer w10: U1.34@2516.85,3100 2578.99,3100 2627.99,3149 3296,3149 3330,3115 v1(3330,3065)
  Bottom Layer w10: v1(3330,3065) 3330,2660 3350,2640 4295,2640 4315,2620 4315,2170 4345,2140 4850,2140 4875,2115 4875,2040 4900,2015 5030,2015 S5.2
"STM RST": C4.2 R6.1 SB1.2 U1.7 | length 1593.1
  Top Layer w10: R6.1 1580,3005 v1(1580,2900) ; C4.2 1574.14,2945 ; 1580.08,3004.92 1580.16,3005 1630.16,3005 1645,3019.84 U1.7@2183.15,3019.84 ; v1(1675,2555) 1675,2490 1695,2470 SB1.2
  Bottom Layer w10: v1(1580,2900) 1580,2695 1600,2675 1660,2675 1675,2660 v1(1675,2555)
"T JTCK": R12.2 S8.1 U1.15 U1.26 | length 4792.1
  Top Layer w10: U1.15 2281.1,2700.86 2291,2690.96 2324.04,2690.96 v1(2325,2690) ; v1(2453.44,2689) 2454.44,2690 2714.3,2690 3010,2690 3020,2700 v1(3020,2715) ; U1.26@2516.85,2941.1 2724.14,2941.1 2730,2935.24 2730,2910 2708.44,2888.44 2708.44,2863.44 v1(2705,2860) ; v1(2705,2720) 2708.44,2716.56 2708.44,2695.86 ; v1(3140,2765) 3240,2765 3250,2755 3250,2690 3265,2675 v1(4070,2675) ; S8.1 4570,3390 4610,3430 5105,3430 5145,3470 R12.2
  Bottom Layer w10: v1(2325,2690) 2325.78,2689.22 2453.22,2689.22 v1(2453.44,2689) ; v1(2705,2720) v1(2705,2860) ; v1(3020,2715) 3020,2755 3030,2765 v1(3140,2765) ; v1(4070,2675) 4135,2675 4145,2685 4145,2930 4170,2955 S8.1
"T JTDI": U1.17
"T JTDO": U1.16
"T JTMS": R10.2 R15.2 S6.1 U1.27 | length 5233.4
  Top Layer w10: U1.27 3318.9,2961.1 3345,2935 3345,2730 3365,2710 v1(4210,2710) ; R15.2@2969.45,2861.1 R15.2 2970,2960 ; v1(4810,2710) 5800,2710 5820,2730 5820,2928.86 S6.1 5821.14,3098.86 5800,3120 5675,3120 5655,3140 5655,3600 5630,3625 5360,3625 5340,3645 R10.2
  Bottom Layer w10: v1(4210,2710) v1(4810,2710)
"T NRST": R8.2 S1.1 U1.18 | length 5298.6
  Top Layer w10: U1.18 2340.16,2784.84 2360,2765 2360,2300 2370,2290 2509.14,2290 2515,2295.86 2515,2470 2525,2480 v1(3280,2480) ; v1(3675,2480) 4275,2480 4295,2500 v1(4295,3305) ; v1(4960,3395) 4960.57,3394.43 5354.43,3394.43 S1.1 ; v1(5530,3745) R8.2
  Bottom Layer w10: v1(3280,2480) v1(3675,2480) ; v1(4295,3305) 4295,3370 4320,3395 v1(4960,3395) ; S1.1 5355,3555 5375,3575 5515,3575 5530,3590 v1(5530,3745)
"T SWDIO IN": R15.1 U1.25 | length 670.8
  Top Layer w10: U1.25 2539.98,2921.73 2540.89,2920.83 2624.17,2920.83 2640,2905 2640,2765 2655,2750 2955,2750 2967.52,2762.52 2967.52,2820.83 R15.1
"T SWO": R7.2 S2.1 U1.31 | length 4249.1
  Top Layer w10: U1.31@2516.85,3039.53 2634.53,3039.53 ; 2634.53,3040.47 2641,3046.94 2656.94,3046.94 v1(2660,3050) ; R7.2 5715,3795 5735,3775 5815,3775 5855,3735 S2.1
  Bottom Layer w10: v1@2663.44,3053.44 v1(2660,3050) 2684.14,3050 2690,3055.86 2690,3175 2705,3190 5675,3190 5705,3220 5705,3350 5740,3385 S2.1
U5V: CN2.1 D3.2 R22.2 | length 5083.6
  Top Layer w10: CN2.1 552.99,1727.99 565,1740 565,2005 ; R22.2 565,2005 ; v1(1025,2075) 1025,2135 1005,2155 580,2155 565,2140 565,2005 ; v1(1125,1120) v1(3045,1120) ; v1(3210,1120) D3.2
  Bottom Layer w10: v1(1025,2075) 1025,1140 1045,1120 v1(1125,1120) ; v1(3045,1120) v1(3210,1120)
"USB DM": R20.2 U1.32 | length 3226.1
  Top Layer w10: R20.2 1615,1760 1630,1775 1630,1895 1650,1915 v1(1790,1915) ; U1.32 2624.53,3059.53 2650,3085 v1(2720,3085)
  Bottom Layer w10: v1(1790,1915) 2310,1915 2330,1935 2330,2565 2345,2580 2815,2580 2845,2610 2845,3060 2820,3085 v1(2720,3085)
"USB DP": R19.2 U1.33 | length 3833.5
  Top Layer w10: R19.2 v1(1685,1665) ; U1.33@2516.85,3079.53 2604.53,3079.53 2650,3125 3035,3125 3045,3115 v1(3045,3070) ; v1(2780,2660) 3055,2660 3080,2685 v1(3080,2865)
  Bottom Layer w10: v1(1685,1665) 1720,1665 1740,1685 1740,2115 1750,2125 2265,2125 2285,2145 2285,2645 2300,2660 v1(2780,2660) ; v1(3045,3070) 3045,2945 3080,2910 v1(3080,2865)
USB_RENUMn: R23.2 U1.38 | length 5572.2
  Top Layer w9.96: U1.38@2438.9,3196.85 2438.9,3683.9 2455,3700 2699.14,3700 2705,3694.14 v1(2705,3670)
  Top Layer w10: v1(1600,2150) 2525,2150 2545,2130 R23.2
  Bottom Layer w10: v1(1600,2150) 1090,2150 1065,2175 1065,2990 1115,3040 1275,3040 1315,3080 1315,3350 1350,3385 2680,3385 2705,3410 v1(2705,3670)
pads on no net: U1.4 U1.11 U1.14 U1.19 U1.22 U1.40 U1.41 U1.42 U1.43 U1.45 U1.46

## Other copper
Top Layer:
  rectangle net GND: 0,0 6570,4555

## Silkscreen, mask and mechanical layers (free items; w line width, h text height)
Mechanical 1:
  the board outline again, w10